# EAGLE board LightSensorCircuit (EAGLE 9.6.2)
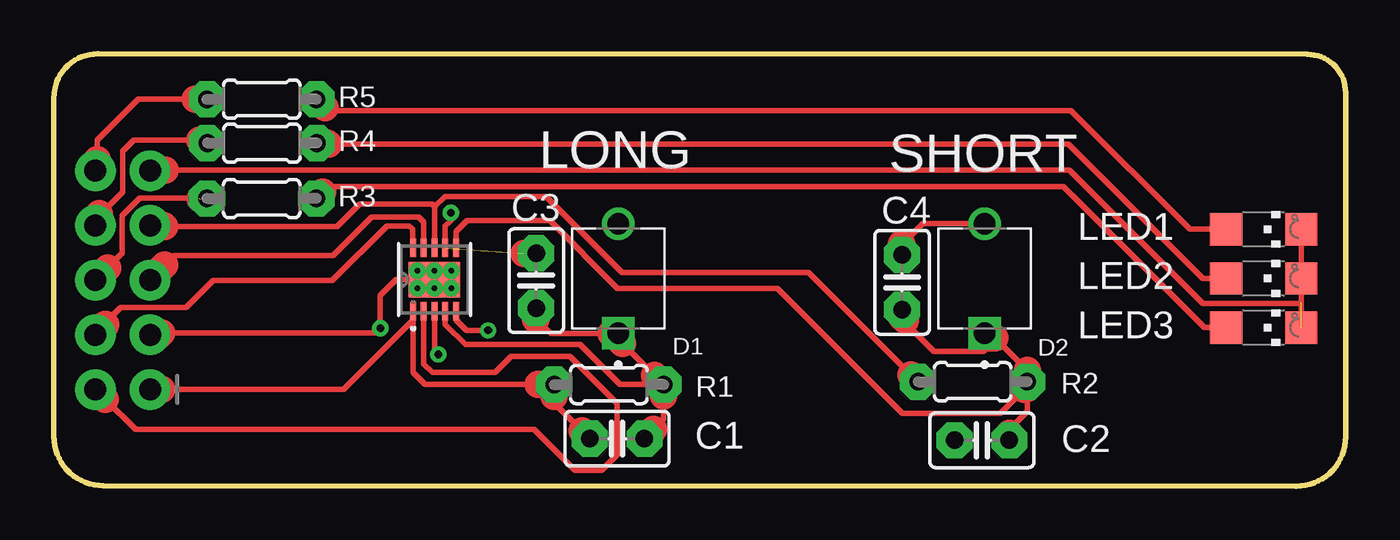
[diagram p0: board, top side]
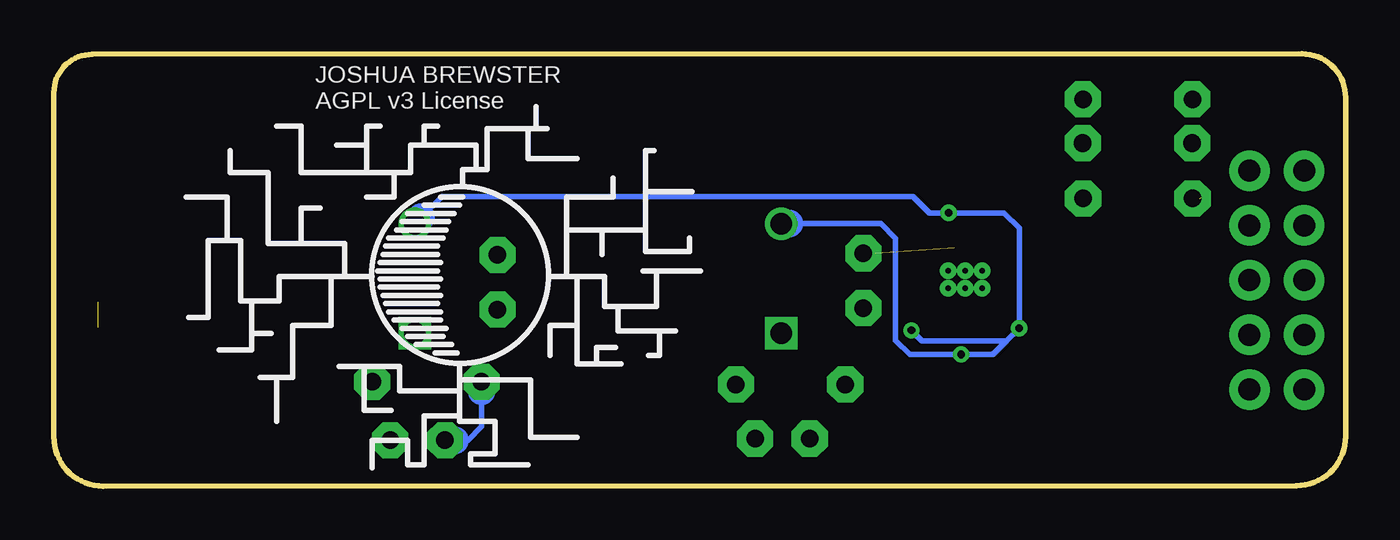
[diagram p1: board, bottom side, seen from below]

Size 59.99 x 20.09 mm. Coordinates in mm from the lower left corner, seen from the top.
Outline: 0,18.06 arc-90 2.03,20.09 58.22,20.07 arc-90 59.99,18.29 59.99,2.29 arc-90 57.71,0 2.29,0.03 arc-90 0,2.31 0,18.06
Copper layers (1*16): Top 0.035mm / dielectric 1.5mm / Bottom 0.035mm
Design rules "default *": minimum track width 6mil, minimum drill 0.35mm, track to track 6mil, track to pad 6mil, pad to pad 6mil, via to via 6mil, smd to smd 6mil, copper to edge 10mil, drill to drill 6mil, minimum pad ring 10mil, minimum via ring 8mil, stop-mask expansion 4mil, vias tented up to drill 0mil, thermal gap 10mil

## Footprints (pad centres in the part's own frame; a part is rotated, then mirrored left to right if it is on the bottom)
C025-025X050 = drill 0.813 pad 1.676 octagon: 1 -1.27,0; 2 1.27,0
DIO_BPW34S = drill 1 pad 1.5: A 2.55,0 | drill 1 pad 1.5 square: C -2.55,0
2X5_NOSILK = drill 1.016 pad 1.88: 1 0,0; 2 0,2.54; 3 2.54,0; 4 2.54,2.54; 5 5.08,0; 6 5.08,2.54; 7 7.62,0; 8 7.62,2.54; 9 10.16,0; 10 10.16,2.54
CHIPLED_1206 = smd 1.5 x 1.5: A 0,-1.75; C 0,1.75
0204/5 = drill 0.813 pad 1.676 octagon: 1 -2.54,0; 2 2.54,0
DRC10_1P65X2P40_TEX = smd 0.85 x 0.28: 1 -1.475,1; 2 -1.475,0.5; 3 -1.475,0; 4 -1.475,-0.5; 5 -1.475,-1; 6 1.475,-1; 7 1.475,-0.5; 8 1.475,0; 9 1.475,0.5; 10 1.475,1 | smd 1.65 x 2.4: 11 0,0 | drill 0.254 pad 0.508: V -0.406,-0.787; V_1 -0.406,0; V_2 -0.406,0.787; V_3 0.406,-0.787; V_4 0.406,0; V_5 0.406,0.787

## Placement (x,y rotation side)
C1  [C025-025X050]  26.16,2.21 0 top
C2  [C025-025X050]  43.1,2.13 0 top
C3  0.1uF  [C025-025X050]  22.4,9.55 270 top
C4  0.1uF  [C025-025X050]  39.4,9.47 270 top
D1  BPW34S  [DIO_BPW34S]  26.21,9.65 90 top
D2  BPW34S  [DIO_BPW34S]  43.23,9.65 90 top
J1  [2X5_NOSILK]  4.47,4.5 90 top
LED1  [CHIPLED_1206]  56.18,11.94 270 top
LED2  [CHIPLED_1206]  56.18,9.65 270 top
LED3  [CHIPLED_1206]  56.18,7.37 270 top
R1  [0204/5]  25.78,4.72 180 top
R2  [0204/5]  42.67,4.85 180 top
R3  [0204/5]  9.65,13.37 180 top
R4  [0204/5]  9.67,15.94 180 top
R5  [0204/5]  9.66,17.98 180 top
U1  OPA1S2385IDRCR  [DRC10_1P65X2P40_TEX]  17.68,9.6 90 top

## Library data of the parts
C1-C4 LED1-LED3 R1-R5 = adafruit
D1 D2 = BPW34S; AVAILABILITY: In Stock; DESCRIPTION: Photodiode 900nm - 130° 2-DIP; MF: Vishay Semiconductor Opto Division; MP: BPW34S; PACKAGE: None; PRICE: None; PURCHASE-URL: https://pricing.snapeda.com/search/part/BPW34S/?ref=eda
J1 = SparkFun-Connectors
U1 = OPA1S2385IDRCR; COPYRIGHT: Copyright (C) 2022 Ultra Librarian. All rights reserved.; MANUFACTURER_PART_NUMBER: OPA1S2385IDRCR; MFR_NAME: Texas Instruments

## Nets
+INA: C1.2 C3.2 D1.C R1.1 U1.4
+INB: C2.2 C4.2 D2.C R2.1 U1.6
AGND: C3.1 C4.1 D1.A D2.A J1.3 U1.3 U1.5 U1.7 U1.11
INS: J1.2 U1.2
LED1: J1.10 R5.2
LED2: J1.8 R4.2
LED3: J1.6 R3.2
LED_GND: J1.9 LED1.C LED2.C LED3.C
LEDR1: LED1.A R5.1
LEDR2: LED2.A R4.1
LEDR3: LED3.A R3.1
OUTA: C1.1 J1.1 R1.2 U1.1
OUTB: C2.1 J1.7 R2.2 U1.8
SWITCHB: J1.4 U1.10
V+: J1.5 U1.9

## Tracks (layer width: path | path; a pad name or v marks a point on that pad's centre or on a via)
+INA
  Top 0.254: U1.4 18.18,7.53 19.13,6.58 24.43,6.58 26.29,4.72 R1.1 | 28.32,4.19 28.32,3.1 27.85,2.63 | 27.9,5.14 26.42,6.63 25.96,7.09 25.88,7.09 23.09,7.09 22.4,7.77
  Top 1.27: 26.42,6.63 26.21,6.83 D1.C 26.2,7.09 25.88,7.09 | 27.9,5.14 R1.1 28.32,4.19 | C1.2 27.85,2.63 | C3.2 22.4,7.77 22.38,7.75
+INB
  Top 0.254: U1.6 18.68,11.84 19.19,12.35 23.04,12.35 26.19,9.2 33.6,9.2 39.42,3.38 43.97,3.38 45.08,4.5 | 45.21,4.55 45.21,3.48 44.37,2.64 44.37,2.46 | 43.7,6.89 45.21,5.37 | C4.2 39.4,7.75 40.88,6.26 43.18,6.26 43.23,6.31 D2.C
  Top 1.27: C2.2 44.37,2.46 | R2.1 45.21,4.55 | R2.1 45.21,5.37 | D2.C 43.23,6.89 43.7,6.89 | C4.2 39.4,7.85 39.55,7.7 | R2.1 45.21,4.62 45.08,4.5
AGND  (via drill 0.35)  (1 unrouted)
  Top 0.254: v20.17,7.24 19.16,7.24 18.68,7.72 U1.5 | U1.7 18.18,12.08 18.44,12.34 v18.44,12.7 | U1.3 17.68,6.3 v17.86,6.12 | U1.11 15.9,9.6 15.16,8.87 v15.16,7.34 15.14,7.34 14.93,7.13 5.01,7.13 | 39.4,11.23 40.37,12.2 D2.A
  Top 1.27: J1.3 4.92,7.04 5.01,7.13 | C3.1 21.84,10.82 | C4.1 39.4,11.23 39.37,11.25
  Bottom 0.254: 42.93,12.5 41.97,13.46 20.09,13.46 19.33,12.7 v18.44,12.7 15.87,12.7 15.16,11.99 v15.16,7.34 15.75,6.76 | 25.83,12.2 21.59,12.2 20.9,11.52 20.9,6.78 20.24,6.12 v17.86,6.12 16.38,6.12 15.75,6.76 | v20.17,7.24 19.68,6.76 15.75,6.76
  Bottom 1.27: D2.A 42.93,12.5 | D1.A 25.83,12.2
INS
  Top 0.254: 2.39,4.04 3.8,2.63 22.31,2.63 24.21,0.74 25.43,0.74 26.16,1.47 26.16,3.84 23.98,6.02 21.24,6.02 20.5,5.29 17.58,5.29 17.18,5.69 U1.2
  Top 1.27: J1.2 2.39,4.04
LED1
  Top 0.254: 6.55,17.98 3.91,17.98 2.01,16.08 2.01,15.16
  Top 1.27: J1.10 2.01,14.73 2.01,15.16 | R5.2 6.55,17.98
LED2
  Top 0.254: 6.78,16.08 3.71,16.08 3.2,15.57 3.2,13.67 2.21,12.67 2.11,12.67
  Top 1.27: J1.8 1.93,12.19 2.11,12.37 2.11,12.67 | R4.2 6.92,15.94 6.78,16.08
LED3  (1 unrouted)
  Top 0.254: 6.73,13.39 3.99,13.39 3.17,12.57 3.17,10.85 2.5,10.17 2.5,10.15
  Top 1.27: 2.5,10.15 J1.6 | R3.2 6.82,13.37 6.79,13.33
LED_GND  (1 unrouted)
  Top 0.254: LED3.C 57.93,8.5 53.35,8.5 47.17,14.68 4.49,14.68 J1.9 | 57.93,8.57 LED2.C LED1.C
  Top 1.27: 5.17,14.69 4.5,14.69 J1.9
LEDR1
  Top 0.254: LED1.A 52.76,11.94 47.24,17.45 12.73,17.45 12.6,17.58
  Top 1.27: R5.1 12.6,17.58
LEDR2
  Top 0.254: 12.75,15.89 47.13,15.89 53.37,9.65 LED2.A
  Top 1.27: R4.1 12.7,15.94 12.75,15.89
LEDR3
  Top 0.254: LED3.A 53.44,7.37 46.88,13.93 12.76,13.93 12.49,13.67
  Top 1.27: R3.1 12.49,13.67
OUTA
  Top 0.254: 16.68,7.72 16.68,5.28 17.24,4.72 22.48,4.72 | U1.1 16.68,7.72 | 24.54,2.56 23.24,3.86 23.24,4.17 | 16.68,7.72 13.45,4.5 5,4.5
  Top 1.27: C1.1 24.54,2.56 | 23.24,4.17 R1.2 22.48,4.72 | J1.1 5,4.5
OUTB
  Top 0.254: U1.8 17.68,12.95 17.7,12.98 17.69,12.98 17.69,12.99 | 17.69,12.99 18.16,13.46 22.86,13.46 26.39,9.93 35.05,9.93 39.81,5.17 | 17.69,12.99 17.57,13.11 14.2,13.11 13.16,12.06 5.15,12.06
  Top 1.27: J1.7 5.1,12.12 5.15,12.06 | R2.2 39.81,5.17
  Bottom 0.254: 41.35,2.13 40.77,2.13 40.13,2.77 40.13,4.39
  Bottom 1.27: R2.2 40.13,4.39 | C2.1 41.35,2.13
SWITCHB
  Top 0.254: U1.10 16.66,11.09 16.66,11.94 16.51,12.09 15.47,12.09 12.93,9.55 7.39,9.55 6.15,8.31 3.1,8.31 1.93,7.14 J1.4 | 2.37,7.43 2.4,7.46 2.4,7.5
  Top 1.27: 2.37,7.43 1.98,7.04 J1.4 2.4,7.5 2.38,7.52
V+
  Top 0.254: U1.9 17.17,12.27 16.94,12.5 14.76,12.5 12.98,10.72 5.59,10.72 5.14,10.27
  Top 1.27: 5.14,10.27 4.47,9.6 J1.5

## Text on the board
tPlace: LONG | SHORT
bNames: JOSHUA BREWSTER / AGPL v3 License